# Altium PCB FPV0-3.PcbDoc (part 2 of 6)
Units mm, origin at the board's own origin, x right, y up, seen from the top; angles counter-clockwise.
Board outline 81.28 x 53.34 mm, 4 copper layers (Top Layer, GND Plane 1, 3v3 Plane 2, Bottom Layer); 178 components, 250 nets, 836 pads, 217 vias.
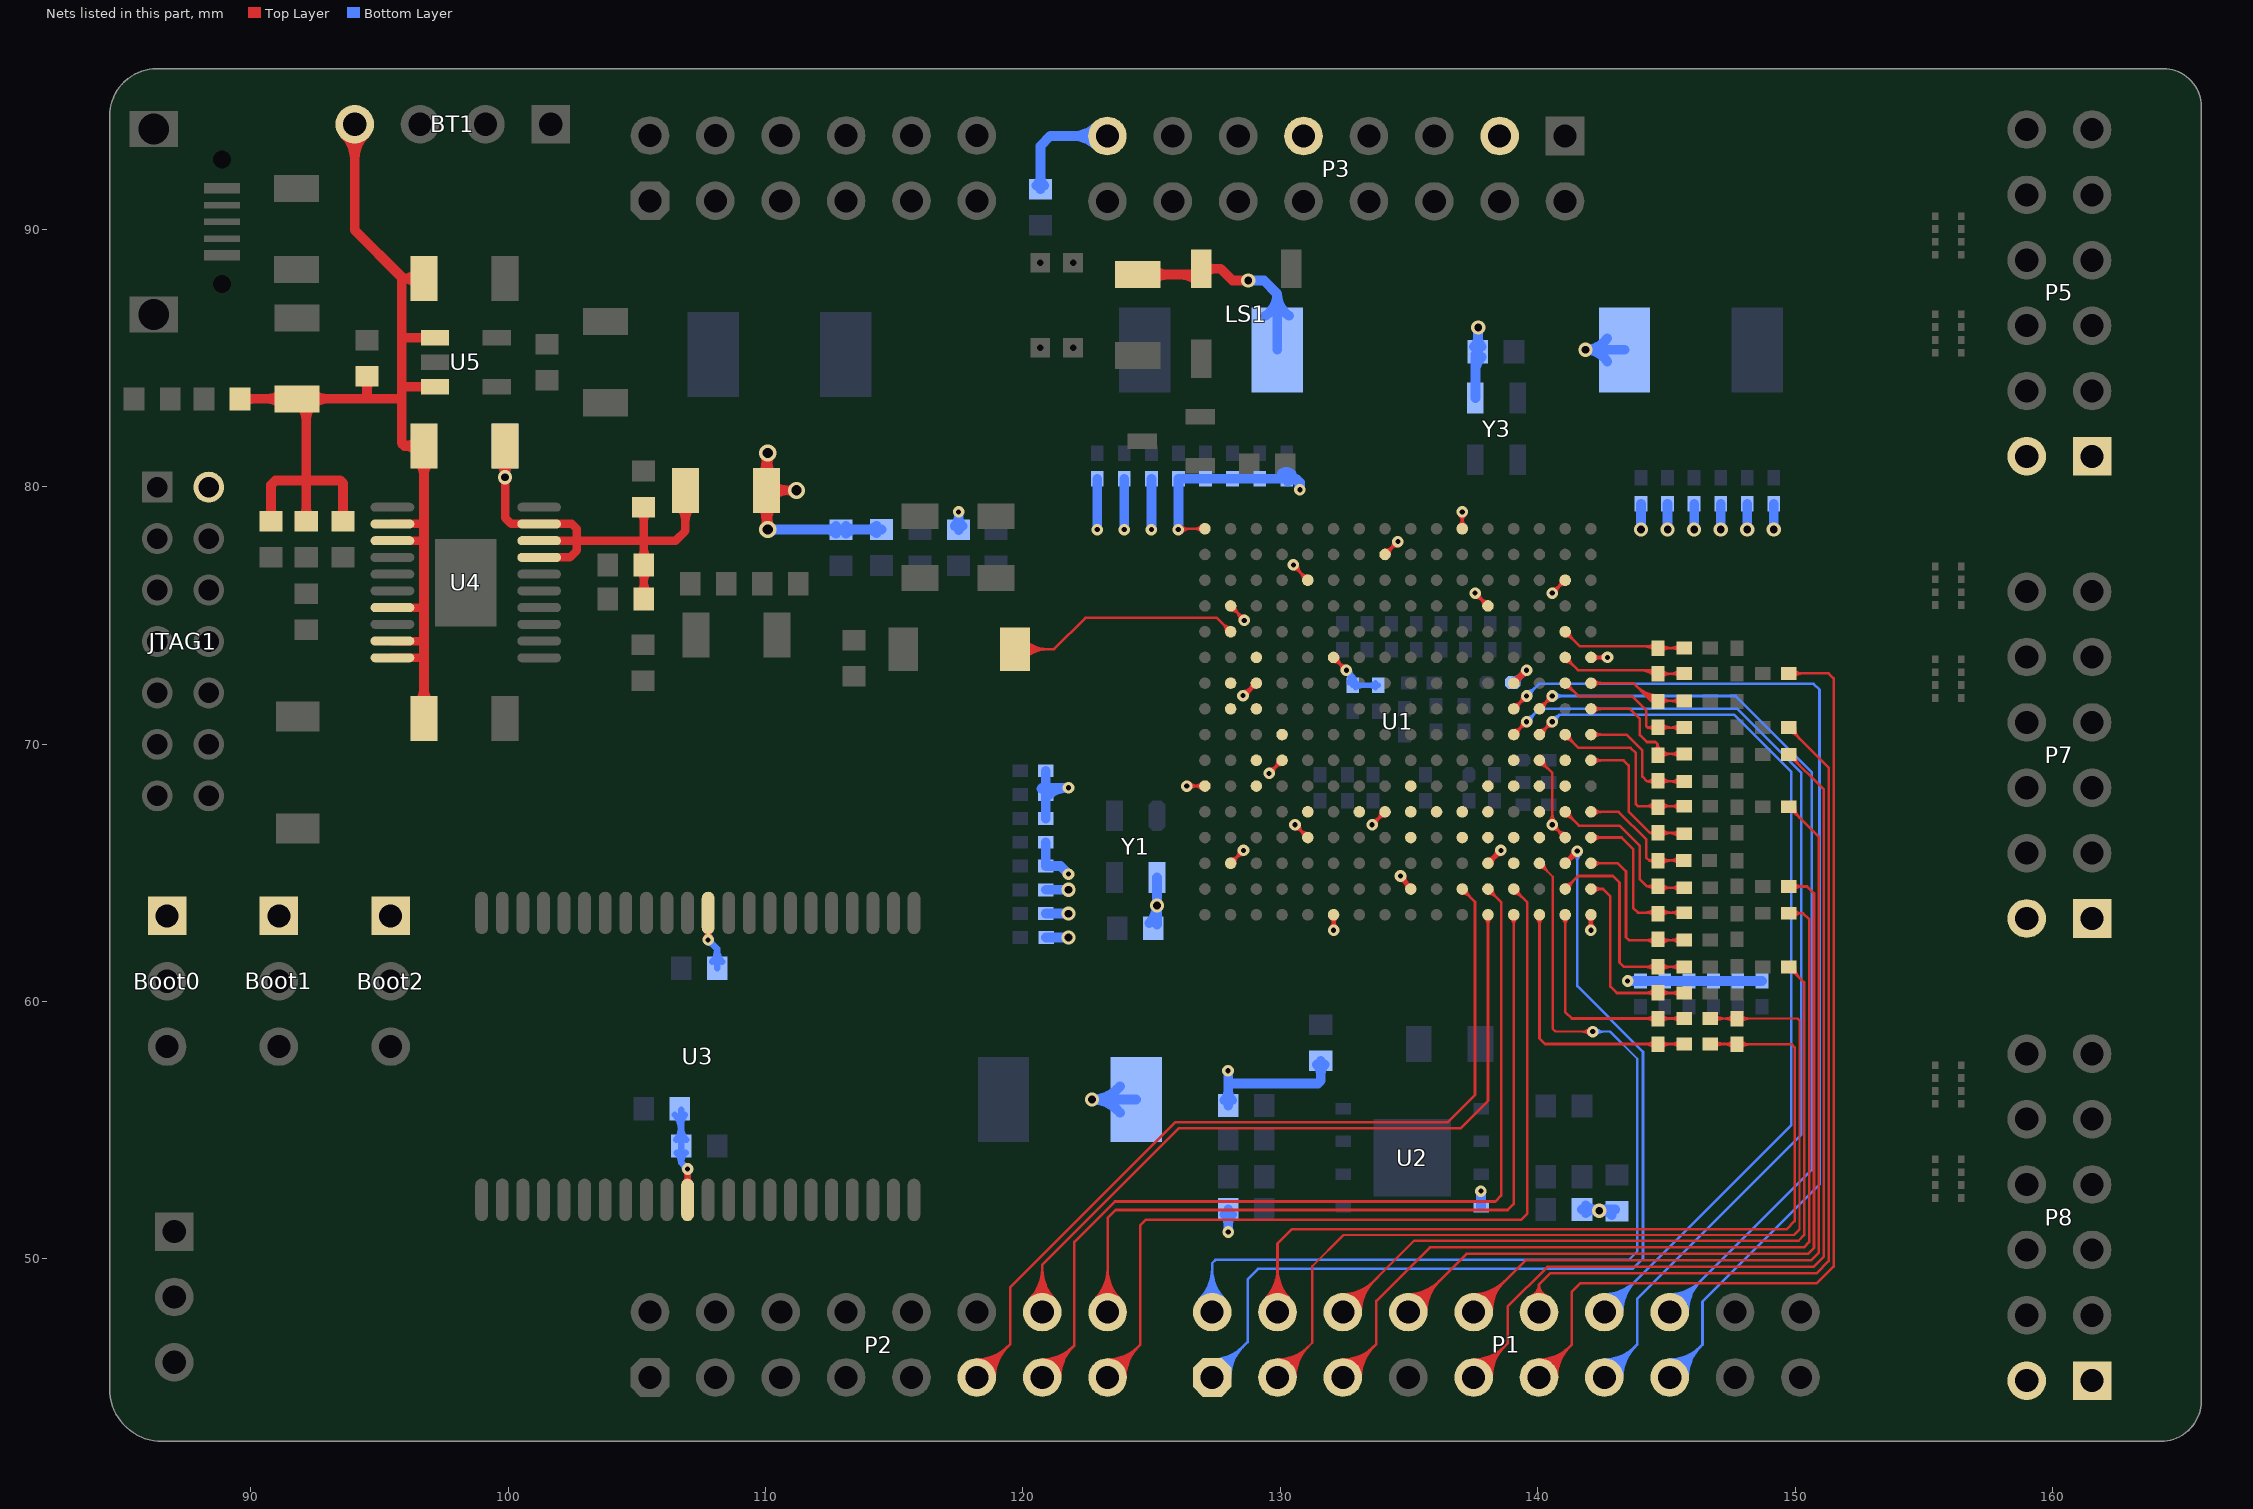
[diagram p4: the nets of this part, all layers, seen from the top]

## Via types
v1: diameter 0.45, hole 0.2, Top Layer to Bottom Layer, tented both sides, 150 vias
v2: diameter 0.55, hole 0.3, Top Layer to Bottom Layer, tented both sides, 55 vias
v3: diameter 0.45, hole 0.2, Top Layer to Bottom Layer, 6 vias
v4: diameter 0.666, hole 0.4, Top Layer to Bottom Layer, tented both sides, 4 vias
v5: diameter 0.513, hole 0.3, Top Layer to Bottom Layer, tented both sides, 1 vias
v6: diameter 0.55, hole 0.23, Top Layer to Bottom Layer, tented both sides, 1 vias

## Nets (pads, with @x,y where several pads share a name; then routed paths per layer and width w, separated by ;. In a path a pad name is that pad's centre, name@x,y a point inside that pad or via, vN(x,y) a via of type N, cw(c..) or ccw(c..) an arc to the next point about the centre after c; other vN are vias at no path point) (continued)
3V3: Boot0.1 Boot1.1 Boot2.1 C1.1 C2.2 C24.1 C25.1 C26.1 C27.1 C28.2 C29.1 C30.1 C31.1 C32.1 C33.1 C34.1 C35.2 C36.1 C37.1 C38.1 C39.1 C40.1 C41.1 C42.1 C43.1 C44.1 C45.1 C46.1 C47.1 C48.1 C49.1 C50.1 C51.1 C52.1 C53.1 C54.1 C55.1 C56.1 C60.2 C61.1 C68.2 D5.2 F3.1 JTAG1.2 LS1.1 P3.3 P3.9 P3.15 P5.1 P5.2 P7.1 P7.2 P8.1 P8.2 R3.1 R8.2 R10.2 R11.2 R12.1 R15.1 R16.1 R18.1 R32.2 R47.2 U1.A6 U1.A16 U1.B3 U1.B13 U1.C10 U1.D7 U1.E4 U1.E14 U1.F1 U1.H15 U1.J2 U1.J12 U1.L6 U1.L16 U1.M3 U1.M13 U1.N10 U1.P7 U1.R4 U1.R14 U1.T1 U1.T11 U2.8 U3.11 U3.33 Y1.4 Y3.4 | length 170.1
  Top Layer w0.102: v1(126.035,78.334) 126.067,78.366 U1.T1@127.069,78.366 ; v1@126.086,78.282 cw(c126.288,78.08) 126.288,78.366 ; v1@126.158,78.21 cw(c126.534,77.835) 126.534,78.366 ; v1@126.158,78.457 ccw(c126.377,78.676) 126.377,78.366 ; v1(126.365,68.366) U1.T11@127.069,68.366 ; v1@126.488,68.243 cw(c126.786,67.945) 126.786,68.366 cw(c126.786,68.787) v1@126.488,68.489 ; U1.T11@126.946,68.243 ccw(c126.649,67.945) 126.649,68.366 ccw(c126.649,68.787) U1.T11@126.946,68.489 ; U1.T1@126.946,78.243 ccw(c126.649,77.945) 126.649,78.366 ccw(c126.649,78.787) U1.T1@126.946,78.489 ; U1.R14@128.069,65.366 v1(128.569,65.866) ; U1.R14@128.069,65.54 ccw(c128.069,65.96) 128.366,65.663 ; U1.R4@128.069,75.192 cw(c128.069,74.771) 128.367,75.069 cw(c128.664,75.366) U1.R4@128.243,75.366 ; U1.R4@128.069,75.366 v1@128.6,74.835 ; U1.R14@128.243,65.366 cw(c128.665,65.366) 128.367,65.664 ; 128.28,75.155 cw(c127.928,74.803) v1@128.426,74.803 ; 128.357,75.078 ccw(c128.6,75.32) v1@128.6,74.977 ; v1@128.395,65.866 cw(c127.974,65.866) 128.271,65.569 cw(c128.569,65.271) v1@128.569,65.692 ; 128.454,74.982 cw(c128.275,74.803) v1@128.528,74.803 ; v1(128.549,71.882) 129.033,72.366 U1.P7@129.069,72.366 U1.P7@129.069,72.392 ; v1@128.549,72.056 ccw(c128.549,72.477) 128.847,72.179 ccw(c129.144,71.882) v1@128.724,71.882 ; v1@128.594,72.05 ccw(c128.651,72.262) 128.761,72.072 ; v1@128.605,72.047 ccw(c128.658,72.203) 128.74,72.06 ccw(c128.781,71.99) v1@128.707,71.956 ; v1@128.621,71.868 cw(c128.931,71.805) 128.773,72.079 ; 128.711,72.043 cw(c129.069,71.685) U1.P7@129.069,72.192 ; v1@128.72,71.847 cw(c129.225,71.745) U1.P7@128.967,72.192 ; 128.797,72.13 ccw(c128.561,72.366) U1.P7@128.895,72.366 ; 128.884,72.217 cw(c129.069,72.032) U1.P7@129.069,72.293 ; v1(129.563,68.859) U1.N10@130.069,69.366 ; v1@129.563,69.034 ccw(c129.563,69.454) 129.86,69.157 ccw(c130.157,68.859) v1@129.737,68.859 ; U1.N10@129.895,69.366 cw(c129.474,69.366) 129.772,69.069 cw(c130.069,68.771) U1.N10@130.069,69.192 ; v1@130.502,76.932 U1.M3@131.069,76.366 ; v1@130.505,76.788 cw(c130.505,76.446) 130.747,76.688 ; v1@130.569,66.692 cw(c130.569,66.271) 130.866,66.569 cw(c131.164,66.866) v1@130.743,66.866 ; v1(130.569,66.866) U1.M13@131.069,66.366 ; v1@130.578,76.962 ccw(c130.832,76.962) 130.652,76.782 ; v1@130.679,76.962 ccw(c131.179,76.962) 130.826,76.609 ; 130.771,66.664 ccw(c131.069,66.962) U1.M13@131.069,66.54 ; 130.77,76.664 ccw(c131.069,76.963) U1.M3@131.069,76.54 ; 130.772,66.663 cw(c130.475,66.366) U1.M13@130.895,66.366 ; 130.772,76.662 cw(c130.476,76.366) U1.M3@130.895,76.366 ; v1@131.946,62.887 ccw(c131.649,63.184) 132.069,63.184 ccw(c132.49,63.184) v1@132.192,62.887 ; U1.L16@131.946,63.243 cw(c131.649,62.945) 132.069,62.945 cw(c132.49,62.945) U1.L16@132.192,63.243 ; v1@131.971,62.907 ccw(c131.883,63.036) 132.034,63.077 ; v1@131.982,62.914 ccw(c131.852,63.139) 132.103,63.072 ; 132.035,63.072 ccw(c132.286,63.139) v1@132.156,62.914 ; v1(132.069,62.763) U1.L16@132.069,63.366 ; U1.L6@132.069,73.192 cw(c132.069,72.772) 132.366,73.069 ; U1.L6@132.069,73.366 v1(132.569,72.866) ; 132.104,63.077 ccw(c132.255,63.036) v1@132.167,62.907 ; U1.L6@132.243,73.366 ccw(c132.664,73.366) 132.367,73.068 ; v1@132.395,72.866 ccw(c131.974,72.866) 132.272,73.163 ccw(c132.569,73.461) v1@132.569,73.04 ; v1(133.569,66.866) U1.J12@134.069,67.366 ; v1@133.569,67.04 ccw(c133.569,67.46) 133.866,67.163 ccw(c134.164,66.866) v1@133.743,66.866 ; U1.J12@133.895,67.366 cw(c133.474,67.366) 133.772,67.069 cw(c134.069,66.771) U1.J12@134.069,67.192 ; U1.J2@134.069,77.366 v1(134.569,77.866) ; U1.J2@134.069,77.54 ccw(c134.069,77.961) 134.367,77.663 ccw(c134.664,77.366) U1.J2@134.243,77.366 ; v1@134.395,77.866 cw(c133.974,77.866) 134.271,77.568 cw(c134.569,77.271) v1@134.569,77.691 ; v1@134.641,64.7 cw(c134.584,64.37) 134.875,64.537 cw(c135.197,64.724) v1@134.838,64.824 ; v1@134.671,64.697 cw(c134.671,64.277) 134.968,64.574 cw(c135.266,64.872) v1@134.845,64.872 ; v1(134.671,64.872) 135.069,64.473 U1.H15@135.069,64.366 ; v1@134.696,64.846 cw(c134.216,64.366) U1.H15@134.895,64.366 ; 134.869,64.673 cw(c134.563,64.366) U1.H15@134.997,64.366 ; 134.955,64.588 ccw(c135.069,64.702) U1.H15@135.069,64.54 ; U1.F1@136.946,78.489 ccw(c136.649,78.787) 137.069,78.787 ccw(c137.49,78.787) U1.F1@137.192,78.489 ; v1@136.946,78.896 cw(c136.649,78.599) 137.069,78.599 cw(c137.49,78.599) v1@137.192,78.896 ; U1.F1@137.069,78.366 v1(137.069,79.019) ; v1@137.569,75.692 cw(c137.569,75.271) 137.866,75.569 cw(c138.164,75.866) v1@137.743,75.866 ; v1(137.569,75.866) U1.E4@138.069,75.366 ; 137.771,75.664 ccw(c138.069,75.961) U1.E4@138.069,75.54 ; 137.772,75.663 cw(c137.475,75.366) U1.E4@137.895,75.366 ; U1.C10@140.069,69.192 cw(c140.069,68.771) 140.367,69.069 cw(c140.664,69.366) U1.C10@140.243,69.366 ; U1.C10@140.069,69.366 140.57,68.866 v1(140.569,66.866) U1.B13@141.069,66.366 ; v1@140.446,66.989 ccw(c140.146,67.288) 140.57,67.288 ; v1@140.569,66.691 cw(c140.569,66.269) 140.868,66.568 ; v1(140.569,75.866) U1.B3@141.069,76.366 ; v1@140.569,76.04 ccw(c140.569,76.46) 140.866,76.163 ccw(c141.164,75.866) v1@140.743,75.866 ; 140.57,67.284 ccw(c140.987,67.284) v1@140.692,66.989 ; v1@140.743,66.866 ccw(c141.162,66.866) 140.866,66.57 ; U1.B13@140.895,66.366 ccw(c140.474,66.366) 140.772,66.663 ccw(c141.069,66.961) U1.B13@141.069,66.54 ; U1.B3@140.895,76.366 cw(c140.474,76.366) 140.772,76.069 cw(c141.069,75.771) U1.B3@141.069,76.192 ; v1@141.946,62.887 ccw(c141.649,63.184) 142.069,63.184 ccw(c142.49,63.184) v1@142.192,62.887 ; U1.A16@141.946,63.243 cw(c141.649,62.945) 142.069,62.945 cw(c142.49,62.945) U1.A16@142.192,63.243 ; v1@141.971,62.907 ccw(c141.883,63.036) 142.034,63.077 ; v1@141.982,62.914 ccw(c141.852,63.139) 142.103,63.072 ; 142.035,63.072 ccw(c142.286,63.139) v1@142.156,62.914 ; v1(142.069,62.763) U1.A16@142.069,63.366 ; U1.A6@142.069,73.366 v1(142.712,73.366) ; 142.104,63.077 ccw(c142.255,63.036) v1@142.167,62.907 ; U1.A6@142.192,73.243 cw(c142.49,72.945) 142.49,73.366 cw(c142.49,73.787) U1.A6@142.192,73.489 ; 142.376,73.335 cw(c142.422,73.161) v1@142.57,73.265 ; 142.376,73.397 ccw(c142.422,73.571) v1@142.57,73.467 ; 142.425,73.349 ccw(c142.367,73.565) v1@142.561,73.453 ; 142.425,73.383 cw(c142.367,73.167) v1@142.561,73.279 ; v1@142.589,73.243 ccw(c142.291,72.945) 142.291,73.366 ccw(c142.291,73.787) v1@142.589,73.489
  Top Layer w0.203: U1.E14@138.069,65.366 v1(138.569,65.866) ; U1.E14@138.069,65.489 ccw(c138.069,65.787) 138.28,65.577 ccw(c138.491,65.366) U1.E14@138.193,65.366 ; v1@138.446,65.866 cw(c138.148,65.866) 138.358,65.655 cw(c138.569,65.445) v1@138.569,65.743
  Top Layer w0.254: U3.11@106.879,52.948 ccw(c106.669,53.158) 106.966,53.158 ccw(c107.263,53.158) U3.11@107.053,52.948 ; v1@106.897,53.417 cw(c106.729,53.249) 106.966,53.249 cw(c107.202,53.249) v1@107.035,53.417 ; U3.11@106.966,52.286 v1(106.966,53.486) ; U3.33@107.679,62.774 cw(c107.469,62.564) 107.766,62.564 cw(c108.063,62.564) U3.33@107.853,62.774 ; v1@107.697,62.458 ccw(c107.529,62.625) 107.766,62.625 ccw(c108.002,62.625) v1@107.835,62.458 ; v1@107.697,62.459 ccw(c107.57,62.59) U3.33@107.746,62.637 ; v1(107.766,62.389) U3.33@107.766,63.436 ; U3.33@107.785,62.637 ccw(c107.961,62.59) v1@107.834,62.459 ; U1.D7@139.069,72.366 v1(139.569,72.866) ; U1.D7@139.069,72.464 ccw(c139.069,72.7) 139.236,72.533 ccw(c139.404,72.366) U1.D7@139.167,72.366 ; v1@139.471,72.866 cw(c139.234,72.866) 139.402,72.699 cw(c139.569,72.531) v1@139.569,72.768
  Top Layer w0.381: F3.1@109.796,79.271 cw(c109.103,78.578) v4@110.084,78.578 ; F3.1@109.796,80.444 ccw(c109.103,81.137) v4@110.084,81.137 ; v4@109.96,78.405 ccw(c109.475,78.685) 110.016,78.83 ; v4@109.96,81.234 cw(c109.534,80.988) 110.009,80.86 ; v4@109.983,78.434 ccw(c109.74,78.678) 110.084,78.678 ccw(c110.428,78.678) v4@110.184,78.434 ; v4@109.983,81.205 cw(c109.74,80.961) 110.084,80.961 cw(c110.428,80.961) v4@110.184,81.205 ; v4(110.084,78.334) F3.1@110.084,79.858 ; 110.084,78.822 cw(c110.718,78.822) F3.1@110.27,79.271 ; 110.084,80.893 ccw(c110.718,80.893) F3.1@110.27,80.444 ; v4(110.084,81.305) F3.1@110.084,79.858 ; F3.1@110.27,79.621 cw(c110.841,79.05) 110.841,79.858 cw(c110.841,80.665) F3.1@110.27,80.094 ; v4@111.1,79.757 ccw(c110.857,79.514) 110.857,79.858 ccw(c110.857,80.202) v4@111.1,79.958 ; v4(111.201,79.858) F3.1@110.084,79.858 ; D5.2@124.46,88.24 LS1.1@126.701,88.24 ; D5.2@125.047,88.003 cw(c125.618,87.432) 125.618,88.24 cw(c125.618,89.047) D5.2@125.047,88.476 ; 126.121,88.24 cw(c126.121,87.31) LS1.1@126.778,87.967 ; LS1.1@126.926,88.466 127.688,88.466 128.143,88.011 v2(128.753,88.011) ; LS1.1@127.075,88.317 cw(c127.432,87.96) 127.432,88.466 cw(c127.432,88.971) LS1.1@127.075,88.614
  Bottom Layer w0.203: v1@132.569,72.743 cw(c132.569,72.445) 132.78,72.655 cw(c132.99,72.866) v1@132.692,72.866 ; C28.2@132.677,72.381 ccw(c132.241,72.538) v1(132.569,72.866) 132.817,72.618 ; C28.2@132.73,72.451 ccw(c132.611,72.618) 132.817,72.618 ; 132.795,72.64 cw(c132.573,72.418) C28.2@132.868,72.312 ; C28.2@132.903,72.451 cw(c133.022,72.618) 132.817,72.618 ; C28.2@132.922,72.175 cw(c133.175,71.922) 133.175,72.28 cw(c133.175,72.639) C28.2@132.922,72.385 ; C35.2@133.702,72.175 ccw(c133.449,71.922) 133.449,72.28 ccw(c133.449,72.639) C35.2@133.702,72.385 ; C35.2@133.807,72.28 C28.2@132.817,72.28 132.817,72.618
  Bottom Layer w0.254: R47.2@106.476,55.586 cw(c105.894,55.005) 106.717,55.005 ; C60.2@106.524,54.624 ccw(c106.058,55.09) 106.717,55.09 ccw(c107.376,55.09) C60.2@106.91,54.624 ; C60.2@106.538,54.125 cw(c106.202,53.735) 106.717,53.735 ; 106.717,55.236 cw(c107.212,55.236) R47.2@106.862,55.586 ; R47.2@106.717,55.781 C60.2@106.717,54.381 106.717,53.735 ; v1@106.868,53.486 ccw(c106.631,53.486) 106.799,53.653 ccw(c106.966,53.821) v1@106.966,53.584 ; C60.2@106.895,54.125 ccw(c107.231,53.735) 106.717,53.735 ; v1(106.966,53.486) 106.717,53.735 ; v1@107.766,62.291 cw(c107.766,62.054) 107.933,62.222 cw(c108.1,62.389) v1@107.864,62.389 ; v1(107.766,62.389) 108.117,62.038 C61.1@108.117,61.29 ; C61.1@107.924,61.533 ccw(c107.458,61.999) 108.117,61.999 ccw(c108.776,61.999) C61.1@108.31,61.533 ; R3.1@139.032,72.39 139.093,72.39 v1(139.569,72.866) ; R3.1@139.082,72.513 ccw(c139.082,72.837) 139.311,72.608 ; R3.1@139.205,72.39 cw(c139.474,72.39) 139.284,72.581 ; v1@139.471,72.866 cw(c139.234,72.866) 139.402,72.699 cw(c139.569,72.531) v1@139.569,72.768
  Bottom Layer w0.381: v4(110.084,78.334) R11.2@114.5,78.334 ; v4@110.184,78.233 cw(c110.428,77.99) 110.428,78.334 cw(c110.428,78.678) v4@110.184,78.434 ; 112.346,78.334 cw(c112.346,77.79) R10.2@112.73,78.174 ; 112.4,78.334 ccw(c112.4,78.801) R10.2@112.73,78.471 ; R10.2@113.127,78.174 cw(c113.511,77.79) 113.511,78.334 ; R10.2@113.127,78.471 ccw(c113.457,78.801) 113.457,78.334 ; 113.94,78.334 ccw(c113.94,78.85) R11.2@114.305,78.485 ; 113.955,78.334 cw(c113.955,77.838) R11.2@114.305,78.188 ; R8.2@117.352,78.471 ccw(c116.995,78.828) 117.5,78.828 ccw(c118.006,78.828) R8.2@117.649,78.471 ; R8.2@117.5,78.322 v1(117.5,79.019) ; R32.2@120.527,91.704 ccw(c120.17,92.062) 120.675,92.062 ccw(c121.181,92.062) R32.2@120.824,91.704 ; R32.2@120.675,91.556 120.675,93.243 121.058,93.626 P3.15@123.282,93.626 ; C32.1@120.711,68.263 cw(c120.801,68.172) 120.801,68.301 ; C53.1@120.888,63.409 v2(121.768,63.409) ; C49.1@120.888,64.335 v2(121.768,64.335) ; C41.1@120.888,66.185 C45.1@120.888,65.26 121.456,65.26 v1(121.768,64.948) ; C37.1@120.888,67.11 C32.1@120.888,68.036 C27.1@120.888,68.961 ; C55.1@120.896,62.484 v2(121.768,62.484) ; 120.939,68.301 v1(121.768,68.301) ; C32.1@120.98,67.994 cw(c121.721,67.253) v1@121.721,68.301 ; v1(122.885,78.334) C26.1@122.885,80.305 ; P3.15@122.886,93.23 ccw(c121.931,92.275) 121.931,93.626 ccw(c121.931,94.976) P3.15@122.886,94.021 ; C50.1@123.768,55.671 ccw(c122.682,54.781) v2(122.682,56.185) ; C50.1@123.768,56.698 cw(c122.682,57.589) v2(122.682,56.185) ; v1(123.937,78.334) C54.1@123.937,80.305 ; C50.1@124.393,56.185 v2(122.682,56.185) ; C2.2@124.91,63.038 ccw(c124.188,63.76) v2@125.209,63.76 ; v1(124.99,78.334) C52.1@124.99,80.305 ; C2.2@125.209,62.99 Y1.4@125.209,64.814 ; v1@126.042,78.334 C48.1@126.042,80.305 C44.1@127.094,80.305 C40.1@128.147,80.305 C36.1@129.199,80.305 C31.1@130.251,80.305 130.616,80.305 ; R12.1@127.828,51.719 cw(c127.471,51.362) 127.976,51.362 cw(c128.482,51.362) R12.1@128.125,51.719 ; R15.1@127.828,56.154 ccw(c127.471,56.512) 127.976,56.512 ccw(c128.482,56.512) R15.1@128.125,56.154 ; v1(127.965,57.302) 127.976,57.291 127.976,56.871 ; v1(127.976,51.04) R12.1@127.976,51.918 ; R15.1@127.976,55.956 127.976,56.871 ; v2(128.753,88.011) 129.362,88.011 129.88,87.493 ; C51.1@129.426,86.639 ccw(c128.849,87.493) 129.88,87.493 ; C51.1@129.88,85.319 129.88,87.493 ; C31.1@130.069,80.521 cw(c130.232,80.284) C31.1@130.435,80.487 ; C31.1@130.285,80.206 cw(c130.496,79.899) 130.759,80.162 ; C51.1@130.333,86.639 cw(c130.911,87.493) 129.88,87.493 ; v1@130.726,79.892 ccw(c130.315,80.004) 130.616,80.305 ; v1(130.759,79.883) 130.759,80.162 ; R16.1@131.424,57.546 cw(c131.066,57.189) 131.572,57.189 cw(c132.078,57.189) R16.1@131.72,57.546 ; R16.1@131.572,57.695 131.572,56.921 131.461,56.811 128.036,56.811 127.976,56.871 ; C68.2@137.531,85.441 ccw(c137.173,85.798) 137.679,85.798 ccw(c138.185,85.798) C68.2@137.827,85.441 ; Y3.4@137.579,83.445 C68.2@137.579,85.142 ; 137.579,84.445 cw(c138.427,84.445) C68.2@137.827,85.044 ; C68.2@137.679,85.242 v2@137.679,86.168 ; U2.8@137.795,52.027 v1(137.795,52.629) ; R18.1@141.721,51.918 C1.1@143.013,51.918 ; R18.1@141.869,51.769 cw(c142.227,51.412) 142.227,51.918 cw(c142.227,52.423) R18.1@141.869,52.066 ; R18.1@142.066,51.918 cw(c142.066,51.54) v2@142.333,51.807 ; v2@142.366,51.918 cw(c142.366,51.19) C1.1@142.88,51.704 ; v2@142.452,51.807 cw(c142.719,51.54) C1.1@142.719,51.918 ; C56.1@142.7,84.869 ccw(c141.859,84.307) v2(141.859,85.319) ; C56.1@142.7,85.768 cw(c141.859,86.33) v2(141.859,85.319) ; C56.1@143.373,85.319 v2(141.859,85.319) ; v1(143.494,60.792) C29.1@144.937,60.792 C33.1@145.882,60.792 C38.1@146.827,60.792 C42.1@147.772,60.792 C46.1@148.717,60.792 ; v2(144.018,78.334) C47.1@144.018,79.34 ; v2(145.049,78.334) C43.1@145.049,79.34 ; v2(146.08,78.334) C39.1@146.08,79.34 ; v2(147.112,78.334) C34.1@147.112,79.34 ; v2(148.143,78.334) C30.1@148.143,79.34 ; v2(149.174,78.334) C25.1@149.174,79.34 ; 130.616,80.305 130.759,80.162
  other v1: 128.6,74.803 130.505,76.962
  other v2: 142.392,51.867 125.209,63.729 137.693,86.182
3V3_IN: C64.1 D2.1 D7.2 F3.2 R29.1 R31.1 U4.17 U4.18 U4.19 | length 28
  Top Layer w0.33: D2.1@99.619,80.98 cw(c99.004,80.366) v2(99.873,80.366) cw(c100.742,80.366) D2.1@100.127,80.98 ; D2.1@99.873,81.585 99.873,78.791 100.112,78.551 U4.19@101.199,78.551 102.475,78.551 102.669,78.356 102.669,77.901 ; U4.17@101.199,77.251 102.397,77.251 102.667,77.521 102.667,77.899 102.669,77.901 ; U4.18@101.199,77.901 102.669,77.901 ; C64.1@105.091,79.042 cw(c104.656,78.607) 105.272,78.607 ; R31.1@105.106,75.857 ccw(c104.705,76.258) 105.272,76.258 ccw(c105.839,76.258) R31.1@105.438,75.857 ; R29.1@105.106,76.746 cw(c104.705,76.345) 105.272,76.345 cw(c105.839,76.345) R29.1@105.438,76.746 ; R29.1@105.106,77.178 ccw(c104.705,77.579) 105.272,77.579 ccw(c105.839,77.579) R29.1@105.438,77.178 ; R31.1@105.272,75.641 R29.1@105.272,76.962 105.272,77.901 ; 105.272,78.676 cw(c105.79,78.676) C64.1@105.424,79.042 ; C64.1@105.272,79.169 105.272,77.901 ; F3.2@106.629,79.253 cw(c106.014,78.639) 106.883,78.639 cw(c107.752,78.639) F3.2@107.137,79.253 ; F3.2@106.883,79.858 106.883,78.283 106.502,77.901 105.272,77.901 ; 102.669,77.901 105.272,77.901
  Bottom Layer w0.33: D7.2@99.619,80.98 cw(c99.005,80.366) v2(99.873,80.366) ; D7.2@99.873,81.585 v2(99.873,80.366) cw(c100.742,80.366) D7.2@100.127,80.98
5V0: BT1.4 C21.1 C62.2 D1.2 D2.2 D3.2 F1.1 L4.1 R21.1 R28.2 U4.2 U4.3 U4.7 U4.9 U4.10 U5.1 U5.3 | length 66.2
  Top Layer w0.33: U4.10@95.499,73.351 96.723,73.351 ; U4.9@95.499,74.001 96.723,74.001 ; U4.7@95.499,75.301 96.662,75.301 ; U4.3@95.499,77.901 96.722,77.901 ; U4.2@95.499,78.551 96.687,78.551
  Top Layer w0.381: L4.1@89.575,83.414 F1.1@91.796,83.413 95.784,83.413 ; L4.1@89.723,83.265 cw(c90.08,82.908) 90.08,83.414 cw(c90.08,83.919) L4.1@89.723,83.562 ; C21.1@90.631,78.801 ccw(c90.274,79.158) 90.78,79.158 ccw(c91.285,79.158) C21.1@90.928,78.801 ; 90.638,83.414 cw(c90.638,82.605) F1.1@91.209,83.177 ; 90.639,83.414 ccw(c90.639,84.22) F1.1@91.209,83.65 ; C21.1@90.78,78.653 90.78,80.061 90.957,80.239 92.151,80.239 ; F1.1@91.909,83.177 cw(c91.325,82.592) 92.151,82.592 ; R21.1@92.003,78.801 ccw(c91.645,79.158) 92.151,79.158 ccw(c92.657,79.158) R21.1@92.299,78.801 ; R21.1@92.151,78.653 92.151,80.239 ; 92.151,82.619 cw(c92.94,82.619) 92.382,83.177 cw(c92.953,82.606) 92.953,83.413 cw(c92.953,84.221) F1.1@92.382,83.65 ; F1.1@92.151,83.058 92.151,80.239 ; R28.2@93.425,78.801 ccw(c93.068,79.158) 93.574,79.158 ccw(c94.079,79.158) R28.2@93.722,78.801 ; R28.2@93.574,78.653 93.574,80.137 93.472,80.239 92.151,80.239 ; BT1.4@93.635,93.686 cw(c92.68,92.731) 94.031,92.731 cw(c95.382,92.731) BT1.4@94.426,93.686 ; BT1.4@94.031,94.082 94.031,89.967 95.86,88.138 95.86,85.786 ; C62.2@94.365,84.14 cw(c94.008,83.783) 94.513,83.783 cw(c95.019,83.783) C62.2@94.662,84.14 ; 94.513,83.439 C62.2@94.513,84.288 ; 95.86,88.087 D3.2@96.723,88.087 ; D2.2@96.477,81.358 ccw(c95.961,80.885) 95.961,81.585 ; D2.2@96.477,81.811 cw(c95.961,82.285) 95.961,81.585 ; D1.2@96.486,71.58 ccw(c95.915,72.151) 96.723,72.151 ccw(c97.531,72.151) D1.2@96.96,71.58 ; D2.2@96.486,80.998 cw(c95.915,80.427) 96.723,80.427 cw(c97.531,80.427) D2.2@96.96,80.998 ; D3.2@96.486,87.851 ccw(c95.915,87.28) 95.915,88.087 ccw(c95.915,88.895) D3.2@96.486,88.324 ; D1.2@96.723,70.993 96.723,73.351 96.723,74.001 D2.2@96.723,81.585 95.961,81.585 ; U5.3@97.149,83.886 95.86,83.886 ; U5.1@97.149,85.786 95.86,85.786 ; 95.86,83.886 95.86,85.786 ; 95.86,83.886 95.86,81.686 95.961,81.585
AD1_N: C57.1 R4.1 U1.A10 | length 8.6
  Top Layer w0.102: U1.A10@142.069,69.366 143.334,69.366 143.535,69.164 143.535,67.386 144.374,66.548 ; U1.A10@142.192,69.243 cw(c142.49,68.945) 142.49,69.366 cw(c142.49,69.787) U1.A10@142.192,69.489 ; C57.1@144.496,66.468 ccw(c144.374,66.414) 144.374,66.548 ; C57.1@144.496,66.628 cw(c144.374,66.682) 144.374,66.548 ; C57.1@144.819,66.407 cw(c145.159,66.067) 145.159,66.548 cw(c145.159,67.029) C57.1@144.819,66.689 ; 145.087,66.548 cw(c145.087,65.948) R4.1@145.512,66.372 ; 145.256,66.548 ccw(c145.256,66.91) R4.1@145.512,66.654 ; 145.333,66.548 cw(c145.333,66.193) R4.1@145.583,66.444 ; R4.1@145.702,66.513 145.668,66.548 C57.1@144.678,66.548 144.374,66.548
AD1_P: C57.2 R2.1 U1.B9 | length 10.3
  Top Layer w0.102: U1.B9@141.069,70.192 cw(c141.069,69.771) 141.367,70.069 cw(c141.664,70.366) U1.B9@141.243,70.366 ; U1.B9@141.069,70.366 141.585,69.85 143.608,69.85 143.815,69.643 143.815,67.666 143.899,67.581 R2.1@145.702,67.581 ; 144.157,67.581 ccw(c144.157,68.119) C57.2@144.538,67.739 ; 144.238,67.581 cw(c144.238,67.157) C57.2@144.538,67.457 ; 144.403,67.581 ccw(c144.403,67.874) C57.2@144.609,67.667 ; C57.2@144.747,67.667 ccw(c144.954,67.874) 144.954,67.581 ; C57.2@144.819,67.457 cw(c145.119,67.157) 145.119,67.581 ; C57.2@144.819,67.739 ccw(c145.199,68.119) 145.199,67.581 ; R2.1@145.512,67.441 ccw(c145.171,67.1) 145.171,67.581 ccw(c145.171,68.062) R2.1@145.512,67.722
AD2_N: C58.1 R6.1 U1.A14 | length 9.8
  Top Layer w0.102: U1.A14@142.069,65.366 143.117,65.366 143.434,65.049 143.434,62.484 143.54,62.378 R6.1@145.702,62.378 ; U1.A14@142.192,65.243 cw(c142.49,64.945) 142.49,65.366 cw(c142.49,65.787) U1.A14@142.192,65.489 ; 144.153,62.378 cw(c144.153,61.834) C58.1@144.538,62.219 ; 144.242,62.378 ccw(c144.242,62.796) C58.1@144.538,62.5 ; 144.398,62.378 cw(c144.398,62.079) C58.1@144.609,62.29 ; C58.1@144.747,62.29 cw(c144.959,62.079) 144.959,62.378 ; C58.1@144.819,62.219 cw(c145.204,61.834) 145.204,62.378 ; C58.1@144.819,62.5 ccw(c145.115,62.796) 145.115,62.378 ; R6.1@145.512,62.237 ccw(c145.171,61.897) 145.171,62.378 ccw(c145.171,62.859) R6.1@145.512,62.519
AD2_P: C58.2 R5.1 U1.A13 | length 9.5
  Top Layer w0.102: U1.A13@142.069,66.366 143.26,66.366 143.713,65.913 143.713,63.627 143.894,63.446 R5.1@145.702,63.446 ; U1.A13@142.192,66.243 cw(c142.49,65.945) 142.49,66.366 cw(c142.49,66.787) U1.A13@142.192,66.489 ; 144.166,63.446 ccw(c144.166,63.972) C58.2@144.538,63.6 ; 144.229,63.446 cw(c144.229,63.011) C58.2@144.538,63.319 ; 144.411,63.446 ccw(c144.411,63.727) C58.2@144.609,63.528 ; C58.2@144.747,63.528 ccw(c144.946,63.727) 144.946,63.446 ; C58.2@144.819,63.319 cw(c145.127,63.011) 145.127,63.446 ; C58.2@144.819,63.6 ccw(c145.191,63.972) 145.191,63.446 ; R5.1@145.512,63.305 ccw(c145.171,62.965) 145.171,63.446 ccw(c145.171,63.927) R5.1@145.512,63.587
AD3_N: C59.1 R22.1 U1.A15 | length 10.7
  Top Layer w0.102: U1.A15@142.069,64.366 142.542,64.366 142.824,64.084 142.824,60.579 143.078,60.325 R22.1@145.702,60.325 ; U1.A15@142.192,64.243 cw(c142.49,63.945) 142.49,64.366 cw(c142.49,64.787) U1.A15@142.192,64.489 ; 144.159,60.325 ccw(c144.159,60.861) C59.1@144.538,60.482 ; 144.236,60.325 cw(c144.236,59.899) C59.1@144.538,60.2 ; 144.404,60.325 ccw(c144.404,60.615) C59.1@144.609,60.41 ; C59.1@144.747,60.41 ccw(c144.953,60.615) 144.953,60.325 ; C59.1@144.819,60.2 cw(c145.121,59.899) 145.121,60.325 ; C59.1@144.819,60.482 ccw(c145.198,60.861) 145.198,60.325 ; R22.1@145.512,60.184 ccw(c145.171,59.844) 145.171,60.325 ccw(c145.171,60.806) R22.1@145.512,60.466
AD3_P: C59.2 R7.1 U1.B15 | length 11
  Top Layer w0.102: U1.B15@141.069,64.366 141.575,64.872 142.926,64.872 143.18,64.618 143.18,61.519 143.358,61.341 C59.2@144.678,61.341 R7.1@145.702,61.341 ; U1.B15@141.069,64.54 ccw(c141.069,64.961) 141.367,64.663 ccw(c141.664,64.366) U1.B15@141.243,64.366 ; C59.2@144.538,61.2 ccw(c144.197,60.86) 144.197,61.341 ccw(c144.197,61.822) C59.2@144.538,61.482 ; C59.2@144.819,61.2 cw(c145.159,60.86) 145.159,61.341 cw(c145.159,61.822) C59.2@144.819,61.482 ; R7.1@145.512,61.2 ccw(c145.171,60.86) 145.171,61.341 ccw(c145.171,61.822) R7.1@145.512,61.482
AD4_N: C69.1 R38.1 U1.A7 | length 9.2
  Top Layer w0.102: U1.A7@142.069,72.366 143.715,72.366 144.402,71.679 ; U1.A7@142.192,72.243 cw(c142.49,71.945) 142.49,72.366 cw(c142.49,72.787) U1.A7@142.192,72.489 ; 143.827,72.254 ccw(c144.678,73.105) C69.1@144.678,71.901 ; 144,72.08 ccw(c144.678,72.758) C69.1@144.678,71.799 ; 144.174,71.907 ccw(c144.678,72.411) C69.1@144.678,71.698 ; 144.347,71.733 ccw(c144.678,72.064) C69.1@144.678,71.596 ; C69.1@144.484,71.745 cw(c144.402,71.763) 144.402,71.679 ; C69.1@144.498,71.618 ccw(c144.402,71.573) 144.402,71.679 ; C69.1@144.747,71.771 ccw(c144.969,71.993) 144.969,71.679 ; C69.1@144.819,71.561 cw(c145.104,71.276) 145.104,71.679 ; C69.1@144.819,71.843 ccw(c145.215,72.238) 145.215,71.679 ; R38.1@145.512,71.538 ccw(c145.171,71.198) 145.171,71.679 ccw(c145.171,72.16) R38.1@145.512,71.82 ; R38.1@145.702,71.679 144.402,71.679
AD4_P: C69.2 R37.1 U1.B7 | length 8.7
  Top Layer w0.102: U1.B7@141.069,72.192 cw(c141.069,71.771) 141.367,72.069 cw(c141.664,72.366) U1.B7@141.243,72.366 ; U1.B7@141.069,72.366 141.579,71.857 143.662,71.857 144.221,71.298 144.221,70.688 144.272,70.637 ; C69.2@144.514,70.765 cw(c144.272,70.932) 144.272,70.637 ; C69.2@144.528,70.521 ccw(c144.272,70.297) 144.272,70.637 ; C69.2@144.747,70.721 ccw(c144.949,70.922) 144.949,70.637 ; C69.2@144.819,70.511 cw(c145.125,70.205) 145.125,70.637 ; C69.2@144.819,70.793 ccw(c145.194,71.167) 145.194,70.637 ; R37.1@145.512,70.497 ccw(c145.171,70.156) 145.171,70.637 ccw(c145.171,71.118) R37.1@145.512,70.778 ; R37.1@145.702,70.637 144.272,70.637
AD8_N: C70.1 R40.1 U1.A9 | length 8
  Top Layer w0.102: U1.A9@142.069,70.366 143.451,70.366 144.069,69.748 144.069,68.732 144.252,68.549 ; U1.A9@142.192,70.243 cw(c142.49,69.945) 142.49,70.366 cw(c142.49,70.787) U1.A9@142.192,70.489 ; C70.1@144.516,68.686 cw(c144.252,68.872) 144.252,68.549 ; C70.1@144.537,68.43 ccw(c144.252,68.148) 144.252,68.549 ; C70.1@144.747,68.64 ccw(c144.966,68.858) 144.966,68.549 ; C70.1@144.819,68.43 cw(c145.108,68.141) 145.108,68.549 ; C70.1@144.819,68.711 ccw(c145.211,69.103) 145.211,68.549 ; R40.1@145.512,68.408 ccw(c145.171,68.068) 145.171,68.549 ccw(c145.171,69.03) R40.1@145.512,68.69 ; R40.1@145.702,68.549 144.252,68.549
AD8_P: C70.2 R39.1 U1.A8 | length 7.6
  Top Layer w0.102: U1.A8@142.069,71.366 143.578,71.366 143.967,70.977 143.967,70.353 144.241,70.079 144.577,70.079 144.657,69.998 ; U1.A8@142.192,71.243 cw(c142.49,70.945) 142.49,71.366 cw(c142.49,71.787) U1.A8@142.192,71.489 ; C70.2@144.551,69.774 ccw(c144.366,69.998) 144.657,69.998 ; C70.2@144.776,69.794 cw(c144.892,69.998) 144.657,69.998 ; C70.2@144.819,69.48 cw(c145.152,69.147) 145.152,69.617 ; C70.2@144.819,69.761 ccw(c145.167,70.109) 145.167,69.617 ; R39.1@145.512,69.477 ccw(c145.171,69.137) 145.171,69.617 ccw(c145.171,70.098) R39.1@145.512,69.758 ; R39.1@145.702,69.617 144.657,69.617 144.657,69.998
AD9_N: C71.1 R46.1 U1.A12 | length 8.1
  Top Layer w0.102: U1.A12@142.069,67.366 143.149,67.366 144.225,66.29 144.225,65.579 144.337,65.467 ; U1.A12@142.192,67.243 cw(c142.49,66.945) 142.49,67.366 cw(c142.49,67.787) U1.A12@142.192,67.489 ; C71.1@144.495,65.283 C71.1@144.678,65.467 ; C71.1@144.505,65.369 ccw(c144.337,65.274) 144.337,65.467 ; C71.1@144.505,65.565 cw(c144.337,65.66) 144.337,65.467 ; C71.1@144.747,65.398 cw(c144.949,65.197) 144.949,65.481 ; C71.1@144.819,65.326 cw(c145.194,64.951) 145.194,65.481 ; C71.1@144.819,65.608 ccw(c145.125,65.913) 145.125,65.481 ; R46.1@145.486,65.34 ccw(c145.146,65) 145.146,65.481 ccw(c145.146,65.962) R46.1@145.486,65.622 ; R46.1@145.519,65.639 R46.1@145.677,65.481 144.693,65.481 C71.1@144.678,65.467 ; 144.337,65.467 C71.1@144.678,65.467
AD9_P: C71.2 R41.1 U1.B12 | length 9.4
  Top Layer w0.102: U1.B12@141.069,67.192 cw(c141.069,66.771) 141.367,67.069 cw(c141.664,67.366) U1.B12@141.243,67.366 ; U1.B12@141.069,67.366 141.608,66.827 143.185,66.827 143.967,66.045 143.967,64.745 144.245,64.467 ; C71.2@144.527,64.337 ccw(c144.245,64.095) 144.245,64.467 ; C71.2@144.527,64.597 cw(c144.245,64.839) 144.245,64.467 ; C71.2@144.819,64.276 cw(c145.153,63.942) 145.153,64.414 ; C71.2@144.819,64.558 ccw(c145.165,64.904) 145.165,64.414 ; R41.1@145.512,64.274 ccw(c145.171,63.933) 145.171,64.414 ccw(c145.171,64.895) R41.1@145.512,64.555 ; R41.1@145.702,64.414 144.731,64.414 C71.2@144.678,64.467 144.245,64.467
AD10_N: P1.1 U1.B14 | length 50.2
  Top Layer w0.102: U1.B14@141.069,65.366 v1(141.54,65.837) ; U1.B14@141.069,65.54 ccw(c141.069,65.961) 141.367,65.663 ccw(c141.664,65.366) U1.B14@141.243,65.366 ; U1.B14@141.146,65.536 ccw(c140.92,65.928) v1@141.368,65.862 ; U1.B14@141.239,65.443 cw(c141.631,65.217) v1@141.565,65.664 ; 141.328,65.641 ccw(c141.185,65.889) v1@141.468,65.847 ; 141.335,65.645 ccw(c141.284,65.733) v1@141.378,65.772 ; 141.344,65.625 cw(c141.592,65.482) v1@141.551,65.765 ; 141.348,65.632 cw(c141.437,65.581) v1@141.475,65.675 ; v1@141.366,65.837 cw(c140.945,65.837) 141.243,65.539 cw(c141.54,65.242) v1@141.54,65.663 ; 141.34,65.648 cw(c141.442,65.472) 141.495,65.669 ccw(c141.442,65.472) 141.34,65.648 ; 141.351,65.637 ccw(c141.175,65.739) 141.372,65.792 cw(c141.175,65.739) 141.351,65.637
  Bottom Layer w0.102: P1.1@127.351,45.386 128.727,46.762 128.727,49.2 129.134,49.606 143.688,49.606 144.094,50.013 144.094,58.039 141.54,60.593 v1(141.54,65.837) ; P1.1@127.351,45.78 ccw(c127.351,46.732) 128.024,46.059 ccw(c128.697,45.386) P1.1@127.745,45.386 ; P1.1@127.351,45.882 ccw(c127.351,47.079) 128.198,46.232 ccw(c129.044,45.386) P1.1@127.847,45.386 ; P1.1@127.351,45.983 ccw(c127.351,47.426) 128.371,46.406 ccw(c129.391,45.386) P1.1@127.948,45.386 ; P1.1@127.351,46.085 ccw(c127.351,47.773) 128.544,46.579 ccw(c129.738,45.386) P1.1@128.05,45.386 ; v1@141.417,65.714 cw(c141.119,65.416) 141.54,65.416 cw(c141.961,65.416) v1@141.663,65.714
AD10_P: P1.2 U1.C14 | length 48.6
  Top Layer w0.089: U1.C14@140.069,65.185 cw(c140.069,64.75) 140.377,65.058 cw(c140.686,65.366) U1.C14@140.25,65.366 ; U1.C14@140.069,65.366 140.589,64.846 140.589,58.928 140.691,58.826 v1(142.138,58.826) ; v1@142.011,58.699 ccw(c141.703,58.391) 141.703,58.826 ccw(c141.703,59.262) v1@142.011,58.954
  Bottom Layer w0.089: P1.2@126.852,48.424 ccw(c125.647,49.629) 127.351,49.629 ccw(c129.054,49.629) P1.2@127.85,48.424 ; P1.2@126.915,48.362 ccw(c125.862,49.414) 127.351,49.414 ccw(c128.84,49.414) P1.2@127.787,48.362 ; P1.2@126.978,48.299 ccw(c126.077,49.2) 127.351,49.2 ccw(c128.625,49.2) P1.2@127.724,48.299 ; P1.2@127.04,48.236 ccw(c126.291,48.985) 127.351,48.985 ccw(c128.41,48.985) P1.2@127.661,48.236 ; P1.2@127.103,48.173 ccw(c126.506,48.77) 127.351,48.77 ccw(c128.196,48.77) P1.2@127.598,48.173 ; P1.2@127.351,47.926 127.351,49.83 127.476,49.955 143.543,49.955 143.866,50.278 143.866,57.774 142.813,58.826 v1(142.138,58.826) ; v1@142.266,58.699 cw(c142.574,58.391) 142.574,58.826 cw(c142.574,59.262) v1@142.266,58.954
AD11_N: C73.1 R56.1 U1.B16 | length 11.8
  Top Layer w0.102: U1.B16@140.946,63.243 cw(c140.649,62.945) 141.069,62.945 cw(c141.49,62.945) U1.B16@141.192,63.243 ; U1.B16@141.069,63.366 141.069,59.591 141.326,59.334 R56.1@145.702,59.334 ; 144.175,59.334 cw(c144.175,58.833) C73.1@144.53,59.187 ; 144.204,59.334 ccw(c144.204,59.794) C73.1@144.53,59.469 ; 144.42,59.334 cw(c144.42,59.078) C73.1@144.601,59.259 ; C73.1@144.739,59.259 cw(c144.921,59.078) 144.921,59.334 ; C73.1@144.811,59.187 cw(c145.166,58.833) 145.166,59.334 ; C73.1@144.811,59.469 ccw(c145.136,59.794) 145.136,59.334 ; R56.1@145.512,59.194 ccw(c145.171,58.853) 145.171,59.334 ccw(c145.171,59.815) R56.1@145.512,59.475
AD11_P: C73.2 R55.1 U1.C16 | length 13.9
  Top Layer w0.102: U1.C16@139.946,63.243 cw(c139.649,62.945) 140.069,62.945 cw(c140.49,62.945) U1.C16@140.192,63.243 ; U1.C16@140.069,63.366 140.069,58.559 140.284,58.344 R55.1@145.702,58.344 ; 144.152,58.344 cw(c144.152,57.81) C73.2@144.53,58.187 ; 144.227,58.344 ccw(c144.227,58.772) C73.2@144.53,58.469 ; 144.397,58.344 cw(c144.397,58.055) C73.2@144.601,58.259 ; C73.2@144.739,58.259 cw(c144.944,58.055) 144.944,58.344 ; C73.2@144.811,58.187 cw(c145.189,57.81) 145.189,58.344 ; C73.2@144.811,58.469 ccw(c145.114,58.772) 145.114,58.344 ; R55.1@145.512,58.203 ccw(c145.171,57.863) 145.171,58.344 ccw(c145.171,58.825) R55.1@145.512,58.485
AD12_N: C74.1 R58.1 U1.B5 | length 8.3
  Top Layer w0.102: U1.B5@141.069,74.192 cw(c141.069,73.771) 141.367,74.069 cw(c141.664,74.366) U1.B5@141.243,74.366 ; U1.B5@141.069,74.366 141.641,73.794 144.612,73.794 C74.1@144.678,73.728 R58.1@145.694,73.728 ; 144.159,73.794 cw(c144.159,73.259) C74.1@144.538,73.637 ; 144.236,73.794 ccw(c144.236,74.22) C74.1@144.538,73.919 ; 144.404,73.794 cw(c144.404,73.504) C74.1@144.609,73.709 ; C74.1@144.819,73.587 cw(c145.159,73.247) 145.159,73.728 cw(c145.159,74.209) C74.1@144.819,73.869 ; 145.152,73.728 ccw(c145.152,74.236) R58.1@145.512,73.877 ; 145.191,73.728 cw(c145.191,73.275) R58.1@145.512,73.595 ; 145.397,73.728 ccw(c145.397,73.991) R58.1@145.583,73.805
AD12_P: C74.2 R57.1 U1.B6 | length 8.3
  Top Layer w0.102: U1.B6@141.069,73.192 cw(c141.069,72.771) 141.367,73.069 cw(c141.664,73.366) U1.B6@141.243,73.366 ; U1.B6@141.069,73.366 141.563,72.873 C74.2@144.534,72.873 ; 143.97,72.873 cw(c143.97,72.069) C74.2@144.538,72.637 ; 144.215,72.873 cw(c144.215,72.315) C74.2@144.609,72.709 ; 144.425,72.873 ccw(c144.425,73.031) C74.2@144.538,72.919 ; C74.2@144.678,72.728 R57.1@145.685,72.728 ; C74.2@144.819,72.587 cw(c145.159,72.247) 145.159,72.728 cw(c145.159,73.209) C74.2@144.819,72.869 ; 145.129,72.728 ccw(c145.129,73.269) R57.1@145.512,72.886 ; 145.214,72.728 cw(c145.214,72.307) R57.1@145.512,72.605 ; 145.375,72.728 ccw(c145.375,73.023) R57.1@145.583,72.815
ADC1: P1.11 R82.1 | length 48.2
  Top Layer w0.102: P1.11@140.051,45.386 141.326,46.66 141.326,48.717 141.656,49.047 150.851,49.047 151.498,49.695 151.498,72.555 151.308,72.746 R82.1@149.75,72.746 ; P1.11@140.051,45.78 ccw(c140.051,46.732) 140.724,46.059 ccw(c141.397,45.386) P1.11@140.445,45.386 ; P1.11@140.051,45.882 ccw(c140.051,47.079) 140.898,46.232 ccw(c141.744,45.386) P1.11@140.547,45.386 ; P1.11@140.051,45.983 ccw(c140.051,47.426) 141.071,46.406 ccw(c142.091,45.386) P1.11@140.648,45.386 ; P1.11@140.051,46.085 ccw(c140.051,47.773) 141.244,46.579 ccw(c142.438,45.386) P1.11@140.75,45.386 ; R82.1@149.941,72.605 cw(c150.281,72.265) 150.281,72.746 cw(c150.281,73.227) R82.1@149.941,72.886
ADC2: P1.12 R65.1 | length 37.9
  Top Layer w0.102: P1.12@139.772,48.567 ccw(c139.588,48.992) 140.051,48.992 ; P1.12@139.813,48.474 ccw(c139.655,48.837) 140.051,48.837 ccw(c140.447,48.837) P1.12@140.289,48.474 ; P1.12@139.853,48.381 ccw(c139.722,48.682) 140.051,48.682 ccw(c140.379,48.682) P1.12@140.248,48.381 ; P1.12@140.051,47.926 140.051,48.992 ; P1.12@140.329,48.567 cw(c140.514,48.992) 140.051,48.992 ; R65.1@149.75,70.637 151.308,69.08 151.308,49.911 150.825,49.428 140.487,49.428 140.051,48.992 ; R65.1@149.8,70.438 cw(c149.8,70.078) 150.055,70.333 ; R65.1@149.898,70.637 ccw(c150.254,70.637) 150.002,70.385 ; R65.1@150,70.637 ccw(c150.601,70.637) 150.176,70.212
ADC3: P1.9 R78.1 | length 45.8
  Top Layer w0.102: P1.9@137.511,45.386 138.836,46.711 138.836,48.137 140.382,49.682 150.72,49.682 151.117,50.08 151.117,68.229 R78.1@149.75,69.596 ; P1.9@137.511,45.78 ccw(c137.511,46.732) 138.184,46.059 ccw(c138.857,45.386) P1.9@137.905,45.386 ; P1.9@137.511,45.882 ccw(c137.511,47.079) 138.358,46.232 ccw(c139.204,45.386) P1.9@138.007,45.386 ; P1.9@137.511,45.983 ccw(c137.511,47.426) 138.531,46.406 ccw(c139.551,45.386) P1.9@138.108,45.386 ; P1.9@137.511,46.085 ccw(c137.511,47.773) 138.704,46.579 ccw(c139.898,45.386) P1.9@138.21,45.386 ; R78.1@149.8,69.397 cw(c149.8,69.037) 150.055,69.291 ; R78.1@149.898,69.596 ccw(c150.254,69.596) 150.002,69.344 ; R78.1@150,69.596 ccw(c150.601,69.596) 150.176,69.171
ADC4: P1.10 R30.1 | length 41.5
  Top Layer w0.102: P1.10@137.511,47.926 139.522,49.936 150.615,49.936 150.927,50.248 150.927,66.388 R30.1@149.75,67.564 ; P1.10@137.511,48.32 ccw(c137.511,49.272) 138.184,48.599 ccw(c138.857,47.926) P1.10@137.905,47.926 ; P1.10@137.511,48.422 ccw(c137.511,49.619) 138.358,48.772 ccw(c139.204,47.926) P1.10@138.007,47.926 ; P1.10@137.511,48.523 ccw(c137.511,49.966) 138.531,48.946 ccw(c139.551,47.926) P1.10@138.108,47.926 ; P1.10@137.511,48.625 ccw(c137.511,50.313) 138.704,49.119 ccw(c139.898,47.926) P1.10@138.21,47.926 ; R30.1@149.8,67.365 cw(c149.8,67.005) 150.055,67.259 ; R30.1@149.898,67.564 ccw(c150.254,67.564) 150.002,67.312 ; R30.1@150,67.564 ccw(c150.601,67.564) 150.176,67.139
ADC5: P1.8 R79.1 | length 40.7
  Top Layer w0.102: P1.8@134.971,47.926 137.236,50.19 150.51,50.19 150.736,50.417 150.736,64.198 150.47,64.465 R79.1@149.75,64.465 ; P1.8@134.971,48.32 ccw(c134.971,49.272) 135.644,48.599 ccw(c136.317,47.926) P1.8@135.365,47.926 ; P1.8@134.971,48.422 ccw(c134.971,49.619) 135.818,48.772 ccw(c136.664,47.926) P1.8@135.467,47.926 ; P1.8@134.971,48.523 ccw(c134.971,49.966) 135.991,48.946 ccw(c137.011,47.926) P1.8@135.568,47.926 ; P1.8@134.971,48.625 ccw(c134.971,50.313) 136.164,49.119 ccw(c137.358,47.926) P1.8@135.67,47.926 ; R79.1@149.941,64.324 cw(c150.281,63.984) 150.281,64.465 cw(c150.281,64.946) R79.1@149.941,64.606
ADC6: P1.5 R35.1 | length 43.8
  Top Layer w0.102: P1.5@132.431,45.386 133.731,46.686 133.731,48.362 135.814,50.444 150.343,50.444 150.546,50.648 150.546,63.195 150.317,63.424 R35.1@149.75,63.424 ; P1.5@132.431,45.78 ccw(c132.431,46.732) 133.104,46.059 ccw(c133.777,45.386) P1.5@132.825,45.386 ; P1.5@132.431,45.882 ccw(c132.431,47.079) 133.278,46.232 ccw(c134.124,45.386) P1.5@132.927,45.386 ; P1.5@132.431,45.983 ccw(c132.431,47.426) 133.451,46.406 ccw(c134.471,45.386) P1.5@133.028,45.386 ; P1.5@132.431,46.085 ccw(c132.431,47.773) 133.624,46.579 ccw(c134.818,45.386) P1.5@133.13,45.386 ; R35.1@149.941,63.283 cw(c150.281,62.943) 150.281,63.424 cw(c150.281,63.905) R35.1@149.941,63.565
ADC7: P1.6 R36.1 | length 39.2
  Top Layer w0.102: P1.6@132.431,47.926 135.204,50.698 150.139,50.698 150.355,50.914 150.355,60.736 R36.1@149.75,61.341 ; P1.6@132.431,48.32 ccw(c132.431,49.272) 133.104,48.599 ccw(c133.777,47.926) P1.6@132.825,47.926 ; P1.6@132.431,48.422 ccw(c132.431,49.619) 133.278,48.772 ccw(c134.124,47.926) P1.6@132.927,47.926 ; P1.6@132.431,48.523 ccw(c132.431,49.966) 133.451,48.946 ccw(c134.471,47.926) P1.6@133.028,47.926 ; P1.6@132.431,48.625 ccw(c132.431,50.313) 133.624,49.119 ccw(c134.818,47.926) P1.6@133.13,47.926 ; R36.1@149.8,61.142 cw(c149.8,60.782) 150.055,61.036 ; R36.1@149.898,61.341 ccw(c150.254,61.341) 150.002,61.089 ; R36.1@150,61.341 ccw(c150.601,61.341) 150.176,60.916
ADC8: P1.4 R55.2 R63.2 | length 44
  Top Layer w0.102: P1.4@129.396,48.42 ccw(c128.203,49.614) 129.891,49.614 ccw(c131.579,49.614) P1.4@130.385,48.42 ; P1.4@129.468,48.348 ccw(c128.448,49.368) 129.891,49.368 ccw(c131.334,49.368) P1.4@130.313,48.348 ; P1.4@129.54,48.276 ccw(c128.693,49.123) 129.891,49.123 ccw(c131.088,49.123) P1.4@130.242,48.276 ; P1.4@129.612,48.204 ccw(c128.939,48.878) 129.891,48.878 ccw(c130.843,48.878) P1.4@130.17,48.204 ; P1.4@129.891,47.926 129.891,50.592 130.442,51.143 149.669,51.143 149.987,51.46 149.987,58.217 149.876,58.328 R63.2@147.744,58.328 ; R55.2@146.702,58.344 R63.2@147.728,58.344 ; R55.2@146.893,58.203 cw(c147.233,57.863) 147.233,58.344 cw(c147.233,58.825) R55.2@146.893,58.485 ; 147.225,58.344 cw(c147.225,57.81) R63.2@147.603,58.187 ; 147.3,58.344 ccw(c147.3,58.772) R63.2@147.603,58.469 ; 147.471,58.344 cw(c147.471,58.055) R63.2@147.675,58.259 ; R63.2@147.885,58.187 cw(c148.225,57.847) 148.225,58.328 cw(c148.225,58.809) R63.2@147.885,58.469
ADC9: P1.3 R56.2 R63.1 | length 49.7
  Top Layer w0.089: P1.3@129.891,45.386 131.242,46.737 131.242,49.708 132.455,50.921 149.955,50.921 150.171,51.137 150.171,59.258 150.095,59.334 R56.2@146.702,59.334 ; P1.3@129.891,45.736 ccw(c129.891,46.58) 130.488,45.983 ccw(c131.086,45.386) P1.3@130.241,45.386 ; P1.3@129.891,45.824 ccw(c129.891,46.884) 130.64,46.135 ccw(c131.389,45.386) P1.3@130.33,45.386 ; P1.3@129.891,45.913 ccw(c129.891,47.187) 130.792,46.287 ccw(c131.693,45.386) P1.3@130.419,45.386 ; P1.3@129.891,46.002 ccw(c129.891,47.491) 130.943,46.438 ccw(c131.996,45.386) P1.3@130.507,45.386 ; P1.3@129.891,46.091 ccw(c129.891,47.794) 131.095,46.59 ccw(c132.3,45.386) P1.3@130.596,45.386 ; R56.2@146.835,59.252 cw(c147.034,59.053) 147.034,59.334 cw(c147.034,59.616) R56.2@146.835,59.417 ; R56.2@146.898,59.189 cw(c147.249,58.838) 147.249,59.334 cw(c147.249,59.831) R56.2@146.898,59.48 ; 147.233,59.334 cw(c147.233,58.817) R63.1@147.598,59.183 ; 147.262,59.334 ccw(c147.262,59.81) R63.1@147.598,59.474 ; 147.447,59.334 cw(c147.447,59.032) R63.1@147.661,59.246 ; 147.477,59.334 ccw(c147.477,59.595) R63.1@147.661,59.411 ; R63.1@147.826,59.246 cw(c148.04,59.032) 148.04,59.334 ; R63.1@147.826,59.411 ccw(c148.011,59.595) 148.011,59.334 ; R63.1@147.889,59.183 cw(c148.255,58.817) 148.255,59.334 ; R63.1@147.889,59.474 ccw(c148.225,59.81) 148.225,59.334
BANK14_IO1: U1.K12
BANK14_IO2: U1.M12
BANK14_IO3: U1.P10
BANK14_IO4: U1.P11
BANK14_IO5: U1.N9
BANK14_IO6: U1.P8
BANK14_IO7: U1.R8
BANK14_IO8: S1.1 U1.R5 | length 14.6
  Top Layer w0.102: S1.1@119.691,73.685 121.209,73.685 122.428,74.905 127.531,74.905 U1.R5@128.069,74.366 ; S1.1@119.918,73.458 cw(c120.466,72.91) 120.466,73.685 cw(c120.466,74.46) S1.1@119.918,73.912 ; S1.1@119.99,73.387 cw(c120.712,72.665) 120.712,73.685 cw(c120.712,74.706) S1.1@119.99,73.984 ; S1.1@120.062,73.315 cw(c120.957,72.42) 120.957,73.685 cw(c120.957,74.951) S1.1@120.062,74.056 ; U1.R5@127.895,74.366 ccw(c127.474,74.366) 127.772,74.663 ccw(c128.069,74.961) U1.R5@128.069,74.54
BANK14_IO9: U1.R7
BANK14_IO10: U1.P6
BANK15_IO1: U1.D10
BANK15_IO2: P1.16 U1.C8 | length 45.6
  Top Layer w0.102: U1.C8@140.069,71.366 v1(140.569,71.866) ; U1.C8@140.069,71.54 ccw(c140.069,71.96) 140.366,71.663 ccw(c140.664,71.366) U1.C8@140.243,71.366 ; v1@140.395,71.866 cw(c139.974,71.866) 140.272,71.569 cw(c140.569,71.271) v1@140.569,71.692
  Bottom Layer w0.102: v1(140.569,71.866) 147.692,71.866 150.647,68.91 150.647,53.442 P1.16@145.131,47.926 ; v1@140.692,71.743 cw(c140.99,71.445) 140.99,71.866 cw(c140.99,72.287) v1@140.692,71.989 ; P1.16@145.131,48.32 ccw(c145.131,49.272) 145.804,48.599 ccw(c146.477,47.926) P1.16@145.525,47.926 ; P1.16@145.131,48.422 ccw(c145.131,49.619) 145.978,48.772 ccw(c146.824,47.926) P1.16@145.627,47.926 ; P1.16@145.131,48.523 ccw(c145.131,49.966) 146.151,48.946 ccw(c147.171,47.926) P1.16@145.728,47.926 ; P1.16@145.131,48.625 ccw(c145.131,50.313) 146.324,49.119 ccw(c147.518,47.926) P1.16@145.83,47.926
BANK15_IO3: P1.14 U1.C9 | length 45.2
  Top Layer w0.102: U1.C9@140.069,70.366 v1(140.569,70.866) ; U1.C9@140.069,70.54 ccw(c140.069,70.96) 140.366,70.663 ; U1.C9@140.243,70.366 cw(c140.664,70.366) 140.367,70.664 ; v1@140.395,70.866 cw(c139.974,70.866) 140.272,70.569 cw(c140.569,70.271) v1@140.569,70.692
  Bottom Layer w0.102: v1(140.569,70.866) 140.847,71.144 ; v1@140.578,71.04 ccw(c140.595,71.395) 140.847,71.144 ; v1@140.743,70.875 cw(c141.098,70.892) 140.847,71.144 ; P1.14@142.591,47.926 149.86,55.195 149.86,68.91 147.626,71.144 140.847,71.144 ; P1.14@142.591,48.32 ccw(c142.591,49.272) 143.264,48.599 ccw(c143.937,47.926) P1.14@142.985,47.926 ; P1.14@142.591,48.422 ccw(c142.591,49.619) 143.438,48.772 ccw(c144.284,47.926) P1.14@143.087,47.926 ; P1.14@142.591,48.523 ccw(c142.591,49.966) 143.611,48.946 ccw(c144.631,47.926) P1.14@143.188,47.926 ; P1.14@142.591,48.625 ccw(c142.591,50.313) 143.784,49.119 ccw(c144.978,47.926) P1.14@143.29,47.926
BANK15_IO4: U1.B10
BANK15_IO5: U1.B11
BANK15_IO6: P1.15 U1.D8 | length 51.8
  Top Layer w0.102: U1.D8@139.069,71.366 v1(139.569,71.866) ; U1.D8@139.069,71.54 ccw(c139.069,71.96) 139.366,71.663 ; U1.D8@139.243,71.366 cw(c139.664,71.366) 139.367,71.664 ; v1@139.395,71.866 cw(c138.974,71.866) 139.272,71.569 cw(c139.569,71.271) v1@139.569,71.692
  Bottom Layer w0.102: v1(139.569,71.866) 140.042,72.339 150.724,72.339 150.952,72.111 150.952,52.883 146.406,48.336 146.406,46.66 P1.15@145.131,45.386 ; v1@139.569,72.04 ccw(c139.569,72.461) 139.866,72.163 ccw(c140.164,71.866) v1@139.743,71.866 ; P1.15@145.131,45.78 ccw(c145.131,46.732) 145.804,46.059 ccw(c146.477,45.386) P1.15@145.525,45.386 ; P1.15@145.131,45.882 ccw(c145.131,47.079) 145.978,46.232 ccw(c146.824,45.386) P1.15@145.627,45.386 ; P1.15@145.131,45.983 ccw(c145.131,47.426) 146.151,46.406 ccw(c147.171,45.386) P1.15@145.728,45.386 ; P1.15@145.131,46.085 ccw(c145.131,47.773) 146.324,46.579 ccw(c147.518,45.386) P1.15@145.83,45.386
BANK15_IO7: P1.13 U1.D9 | length 49.6
  Top Layer w0.102: U1.D9@139.069,70.366 v1(139.569,70.866) ; U1.D9@139.069,70.54 ccw(c139.069,70.96) 139.366,70.663 ; U1.D9@139.243,70.366 cw(c139.664,70.366) 139.367,70.664 ; v1@139.395,70.866 cw(c138.974,70.866) 139.272,70.569 cw(c139.569,70.271) v1@139.569,70.692
  Bottom Layer w0.102: v1(139.569,70.866) 140.077,71.374 147.752,71.374 150.241,68.885 150.241,54.813 143.866,48.438 143.866,46.66 P1.13@142.591,45.386 ; v1@139.569,71.04 ccw(c139.569,71.461) 139.866,71.163 ccw(c140.164,70.866) v1@139.743,70.866 ; P1.13@142.591,45.78 ccw(c142.591,46.732) 143.264,46.059 ccw(c143.937,45.386) P1.13@142.985,45.386 ; P1.13@142.591,45.882 ccw(c142.591,47.079) 143.438,46.232 ccw(c144.284,45.386) P1.13@143.087,45.386 ; P1.13@142.591,45.983 ccw(c142.591,47.426) 143.611,46.406 ccw(c144.631,45.386) P1.13@143.188,45.386 ; P1.13@142.591,46.085 ccw(c142.591,47.773) 143.784,46.579 ccw(c144.978,45.386) P1.13@143.29,45.386
BANK15_IO8: U1.C11
BANK15_IO9: U1.C12
BANK15_IO10: U1.D13
BANK15_IO11: U1.C13
BANK15_IO12: U1.E12
BANK15_IO13: U1.E13
BANK15_IO14: U1.E11
BANK15_IO15: U1.D11
BANK15_IO16: U1.D14
BANK15_IO17: P2.15 U1.D15 | length 43.5
  Top Layer w0.102: P2.15@123.287,45.386 124.562,46.66 124.562,51.308 124.765,51.511 139.344,51.511 139.598,51.765 139.598,63.837 U1.D15@139.069,64.366 ; P2.15@123.287,45.78 ccw(c123.287,46.732) 123.96,46.059 ccw(c124.633,45.386) P2.15@123.681,45.386 ; P2.15@123.287,45.882 ccw(c123.287,47.079) 124.134,46.232 ccw(c124.98,45.386) P2.15@123.783,45.386 ; P2.15@123.287,45.983 ccw(c123.287,47.426) 124.307,46.406 ccw(c125.327,45.386) P2.15@123.884,45.386 ; P2.15@123.287,46.085 ccw(c123.287,47.773) 124.48,46.579 ccw(c125.674,45.386) P2.15@123.986,45.386 ; U1.D15@139.069,64.192 cw(c139.069,63.771) 139.367,64.069 cw(c139.664,64.366) U1.D15@139.243,64.366
BANK15_IO18: U1.F12
BANK15_IO19: U1.F13
BANK15_IO20: P2.14 U1.E16 | length 38
  Top Layer w0.102: P2.14@120.252,48.42 ccw(c119.059,49.614) 120.747,49.614 ccw(c122.435,49.614) P2.14@121.241,48.42 ; P2.14@120.324,48.348 ccw(c119.304,49.368) 120.747,49.368 ccw(c122.19,49.368) P2.14@121.169,48.348 ; P2.14@120.396,48.276 ccw(c119.549,49.123) 120.747,49.123 ccw(c121.944,49.123) P2.14@121.098,48.276 ; P2.14@120.468,48.204 ccw(c119.795,48.878) 120.747,48.878 ccw(c121.699,48.878) P2.14@121.026,48.204 ; P2.14@120.747,47.926 120.747,49.761 126.057,55.071 137.011,55.071 138.069,56.129 U1.E16@138.069,63.366 ; U1.E16@137.946,63.243 cw(c137.649,62.945) 138.069,62.945 cw(c138.49,62.945) U1.E16@138.192,63.243
BANK15_IO21: P2.16 U1.D16 | length 39.9
  Top Layer w0.102: P2.16@122.792,48.42 ccw(c121.599,49.614) 123.287,49.614 ccw(c124.975,49.614) P2.16@123.781,48.42 ; P2.16@122.864,48.348 ccw(c121.844,49.368) 123.287,49.368 ccw(c124.73,49.368) P2.16@123.709,48.348 ; P2.16@122.936,48.276 ccw(c122.089,49.123) 123.287,49.123 ccw(c124.484,49.123) P2.16@123.638,48.276 ; P2.16@123.008,48.204 ccw(c122.335,48.878) 123.287,48.878 ccw(c124.239,48.878) P2.16@123.566,48.204 ; P2.16@123.287,47.926 123.287,51.583 123.596,51.892 138.836,51.892 139.069,52.125 U1.D16@139.069,63.366 ; U1.D16@138.946,63.243 cw(c138.649,62.945) 139.069,62.945 cw(c139.49,62.945) U1.D16@139.192,63.243
BANK15_IO22: P2.11 U1.F15 | length 42.4
  Top Layer w0.102: P2.11@118.207,45.386 119.507,46.686 119.507,48.895 125.911,55.299 136.503,55.299 137.566,56.363 137.566,63.869 U1.F15@137.069,64.366 ; P2.11@118.207,45.78 ccw(c118.207,46.732) 118.88,46.059 ccw(c119.553,45.386) P2.11@118.601,45.386 ; P2.11@118.207,45.882 ccw(c118.207,47.079) 119.054,46.232 ccw(c119.9,45.386) P2.11@118.703,45.386 ; P2.11@118.207,45.983 ccw(c118.207,47.426) 119.227,46.406 ccw(c120.247,45.386) P2.11@118.804,45.386 ; P2.11@118.207,46.085 ccw(c118.207,47.773) 119.4,46.579 ccw(c120.594,45.386) P2.11@118.906,45.386 ; U1.F15@137.069,64.192 cw(c137.069,63.771) 137.367,64.069 cw(c137.664,64.366) U1.F15@137.243,64.366
BANK15_IO23: P2.13 U1.E15 | length 44.2
  Top Layer w0.102: P2.13@120.747,45.386 121.996,46.635 121.996,50.651 123.567,52.222 138.354,52.222 138.582,52.451 138.582,63.853 U1.E15@138.069,64.366 ; P2.13@120.747,45.78 ccw(c120.747,46.732) 121.42,46.059 ccw(c122.093,45.386) P2.13@121.141,45.386 ; P2.13@120.747,45.882 ccw(c120.747,47.079) 121.594,46.232 ccw(c122.44,45.386) P2.13@121.243,45.386 ; P2.13@120.747,45.983 ccw(c120.747,47.426) 121.767,46.406 ccw(c122.787,45.386) P2.13@121.344,45.386 ; P2.13@120.747,46.085 ccw(c120.747,47.773) 121.94,46.579 ccw(c123.134,45.386) P2.13@121.446,45.386 ; U1.E15@138.069,64.192 cw(c138.069,63.771) 138.367,64.069 cw(c138.664,64.366) U1.E15@138.243,64.366
BANK15_IO24: U1.H11
BANK15_IO25: U1.G12
BANK15_IO26: U1.H12
BANK15_IO27: U1.H13